# Altium PCB PCB1.PcbDoc
Units mm, origin at the board's own origin, x right, y up, seen from the top; angles counter-clockwise.
Board outline 42.11 x 50 mm, 2 copper layers (Top Layer, Bottom Layer); 15 components, 14 nets, 63 pads, 4 vias.
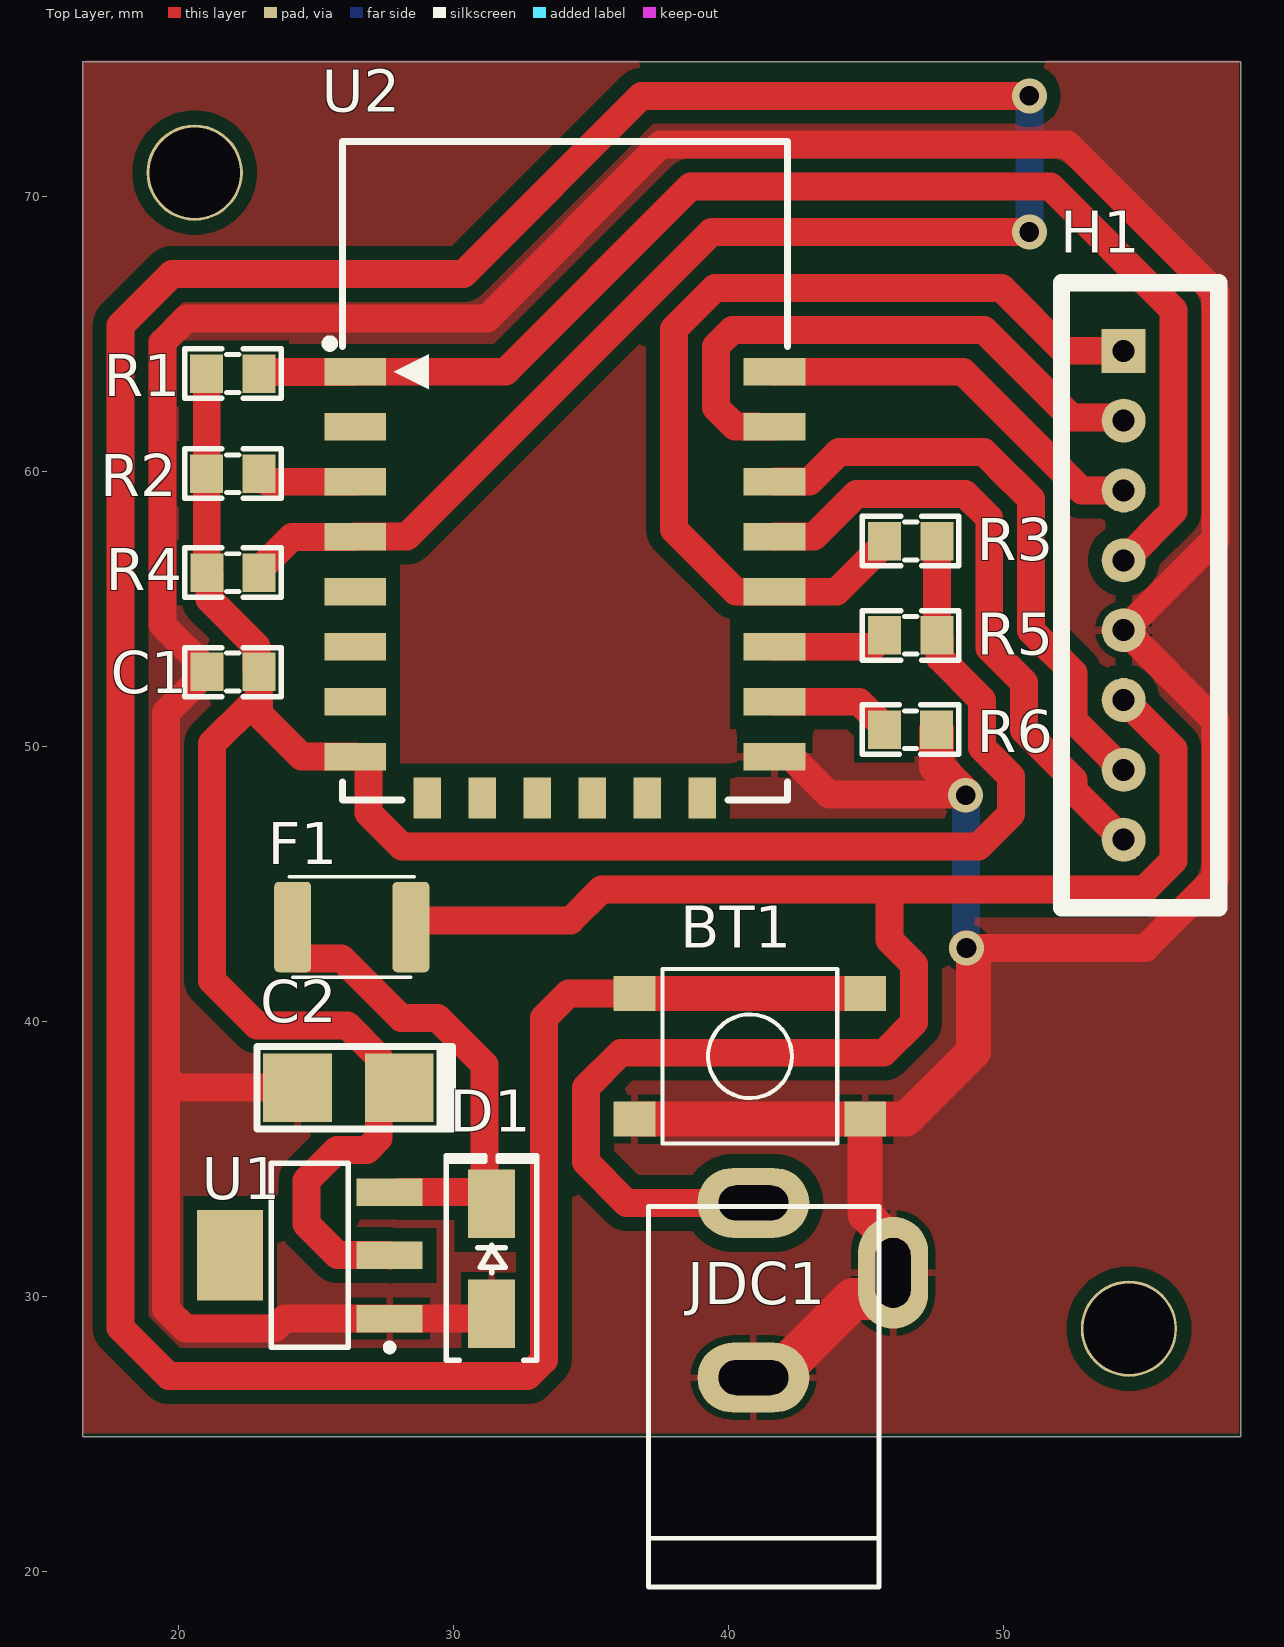
[diagram p0: Top Layer view]
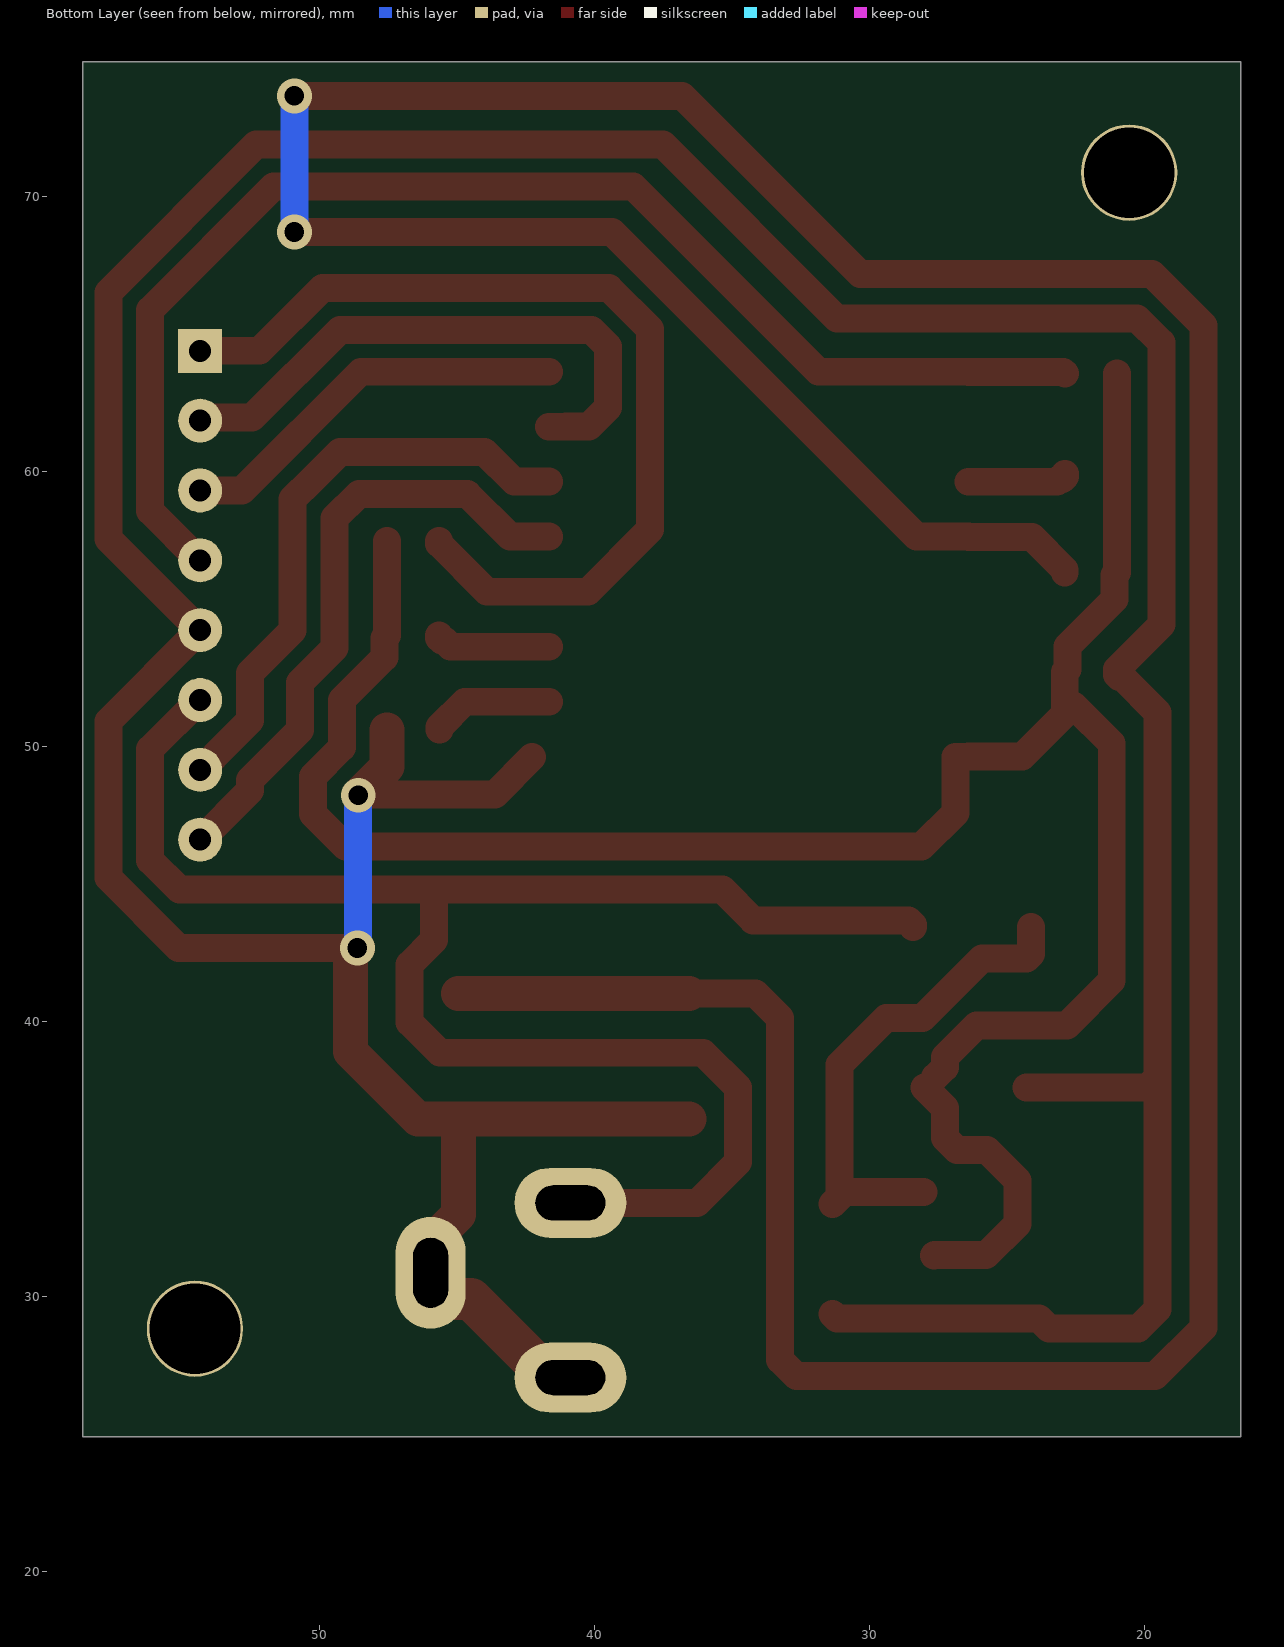
[diagram p1: Bottom Layer view, seen from below]
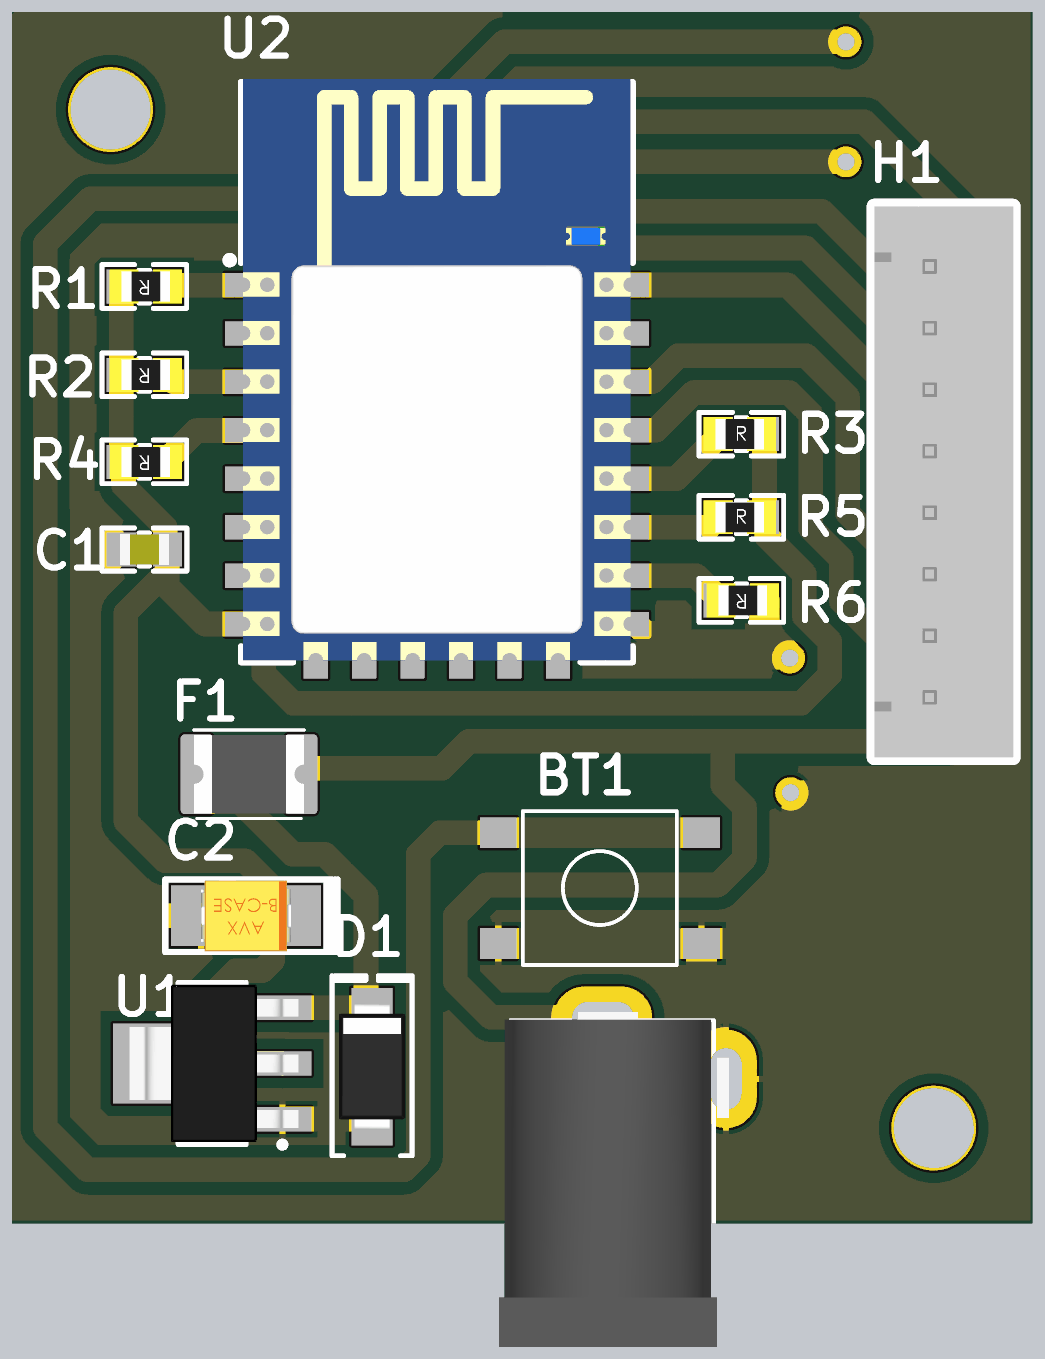
[diagram p2: 3D render of the assembled board from above, using the file's embedded part models]

## Layer stack, top to bottom
Top Solder: solder mask 0.0102, Solder Resist, Dk 3.5
Top Layer: signal copper 0.0356
Dielectric 1: dielectric 0.32, FR-4, Dk 4.8
Bottom Layer: signal copper 0.0356
Bottom Solder: solder mask 0.0102, Solder Resist, Dk 3.5

## Board outline
16.51,24.892 58.621,24.892 58.621,74.892 16.51,74.892 16.51,74.803

## Design rules (kind name [scope] priority, off if disabled: settings)
Clearance [All] p1: gap=0.508 ignorepadtopadclearanceinfootprint=FALSE
PolygonConnect [All] p1: connectstyle=Relief reliefconductorwidth=0.254 reliefentries=4 polygonreliefangle="90 Angle" airgapwidth=0.254
RoutingVias [All] p1: holewidth=0.711 width=1.27 viastyle="Through Hole" minholewidth=0.711 minwidth=1.27 maxholewidth=0.711 maxwidth=1.27
SolderMaskExpansion [All] p1: expansion=0.102 istentingtop=FALSE
Width [All] p1: maxlimit=1.524 minlimit=1.016 preferedwidth=1.27 minimp=50.000000 maximp=50.000000 favimp=50.000000
30 further rules are at their usual default settings.

## Components (designator, comment, footprint, x,y, rotation, side; value= is the part's Value field where it differs from the comment)
BT1 "Nut Nhan 4 Chan SMD 6x6" "Nut Nhan 4 Chan SMD 6x6" 40.767,38.735 r180 top
C1 "100nF" "tu 0805" 21.971,52.705 r180 top
C2 "100uF" "tu tantalum smd3528" 26.162,37.592 r180 top
D1 "SS34" "DIODE SMA" 31.369,31.369 r90 top
F1 "2.6A 6V" "Cau chi tu phuc hoi 2A 24V SMD1812" 26.289,43.434 r0 top
H1 "Header 8P 2.54 Duc Thang" XH2.54M-8 54.356,64.389 r270 top
JDC1 "Jac DC" DC0 43.434,30.226 r90 top
R1 "10k" "tro smd 0805" 21.968,63.5 r180 top
R2 "10k" "tro smd 0805" 21.968,59.855 r180 top
R3 "10k" "tro smd 0805" 46.609,57.531 r0 top
R4 "10k" "tro smd 0805" 21.971,56.261 r180 top
R5 "10k" "tro smd 0805" 46.609,54.102 r0 top
R6 "10k" "tro smd 0805" 46.609,50.546 r180 top
U1 "AMS1117-3.3V" SOT223 24.765,31.496 r90 top value="AMS1117-3.3V SOT223"
U2 "ESP8266 12" "ESP8266 12" 26.041,63.626 r0 top

## Footprints (in the part's own frame and the unit in brackets; to place one, negate y for a bottom-side part, rotate by r counter-clockwise, add the part's x,y. Pads: shape width x height; smd on the part's side, far side on the other; paste and mask are expansions set on the pad)
"Cau chi tu phuc hoi 2A 24V SMD1812" [mm]
  rrect25% 1.34x3.29 smd: 1(-2.15,0) 2(2.15,0)
  silkscreen extent -2.28,-1.83 2.28,1.83, body extent -2.27,-1.62 2.27,1.62, height 1.25
DC0 [mil] "Jac DC input"
  oval 100x160 hole 50 slot 100 at 90 deg: 1(125,100) 2(-125,100)
  oval 160x100 hole 50 slot 100 at 0 deg: 3(25,-100)
  silkscreen extent -425,-80 120,250, body extent -410,-105 134,269, height 434
"DIODE SMA" [mm] "SMA"
  rect 2.5x1.7 smd: 1(-2,0) 2(2,0)
  silkscreen extent -3.68,-1.65 3.75,1.65, body extent -2.6,-1.37 2.6,1.37, height 2.4
"ESP8266 12" [mm] "ESP-12 Wi-Fi Module by AI-Thinker"
  rect 2.25x1 smd: 1(0.375,0) 2(0.375,-2) 3(0.375,-4) 4(0.375,-6) 5(0.375,-8) 6(0.375,-10) 7(0.375,-12) 8(0.375,-14) 15(15.625,-14) 16(15.625,-12) 17(15.625,-10) 18(15.625,-8) 19(15.625,-6) 20(15.625,-4) 21(15.625,-2) 22(15.625,0)
  rect 1x1.5 smd: 9(3,-15.5) 10(5,-15.5) 11(7,-15.5) 12(9,-15.5) 13(11,-15.5) 14(13,-15.5)
  silkscreen extent -0.7,-15.57 16.08,8.37, body extent 0,-15.49 16,8.51, height 2.75
"Nut Nhan 4 Chan SMD 6x6" [mil] "SW SMD button 4pin, 250 x250 mil"
  rect 60x50 smd: 1(-165,90) 2(165,-90) 3(165,90) 4(-165,-90)
  silkscreen extent -125,-125 125,125, body extent -180,-125 180,125, height 130
SOT223 [mm]
  rect 1x2.4 smd: 1(-2.3,-2.9) 2(0,-2.9) 3(2.3,-2.9)
  rect 3.3x2.4 smd: 4(0,2.9)
  silkscreen extent -3.47,-3.03 3.35,1.4, body extent -3.25,-3.56 3.25,3.4, height 1.68
"tro smd 0805" [mm]
  rect 1.2x1.4 smd: 1(-0.946,-0.061) 2(0.954,-0.061)
  silkscreen extent -1.75,-0.97 1.75,0.84, body extent -1.56,-0.76 1.44,0.64, height 0.53
"tu 0805" [mm] "Compoment SMD 80x50mil"
  rect 1.2x1.4 smd: 1(-0.946,-0.003) 2(0.954,-0.003)
  silkscreen extent -1.75,-0.89 1.75,0.89, body extent -1.01,-0.64 1.01,0.63, height 0.61
"tu tantalum smd3528" [mm]
  rect 2.5x2.5 smd: 1(-1.85,0) 2(1.85,0)
  silkscreen extent -3.78,-1.5 3.33,1.5, body extent -1.85,-1.46 1.85,1.47, height 2.03
XH2.54M-8 [mm]
  rect 1.6x1.6 hole 0.8: 1(0,0)
  round 1.6 hole 0.8: 2(2.54,0) 3(5.08,0) 4(7.62,0) 5(10.16,0) 6(12.7,0) 7(15.24,0) 8(17.78,0)
  silkscreen extent -2.48,-2.26 20.26,3.46, body extent -2.48,-2.26 20.26,3.48, height 6.91

## Part data
BT1: "Nut Nhan 4 Chan 6.2x6.2x3.5", Ma_Hang=MH002424, Ten="Nút Nhấn 4 Chân 6.2x6.2x3.1MM SMD"
C1: library part "Tu 0805 221 50V", "Dán", Chung_Loai=Dán, Don_Vi=Con, Ma_Hang=MH007365, So_Chan=2, Ten_Linh_Kien="Tụ 0805 221-220P 50V"
C2: library part "Tu tantalum 100uF 6.3V SMD3528", "Tu Tantalum SMD3528", Chung_Loai=Dán, Don_Vi=Con, Ma_Hang=MH007595, So_Chan=2, Ten_Linh_Kien="Tụ tantalum 107J-100uF 6.3V SMD3528"
D1: library part "Diode SS34 ( 1N5822 )", "Dán", Chung_Loai=Dán, Don_Vi=Con, Ma_Hang=MH002104, Ten_Linh_Kien="Diode SS34 3A 40V SMA ( 1N5822 SS34A)"
F1: library part "Cau chi tu phuc hoi 2A 24V SMD1812", "https://linhkienchatluong.vn/cau-chi-tu-phuc-hoi-ptc/cau-chi-tu-phuc-hoi-1812-26a-6v-smd-2xx260f_sp845_ct1259.aspx", Ma_Hang=MH010033, Ten="Cầu Chì Tự Phục Hồi 2A 24V SMD1812"
H1: "Cắm", Chung_Loai=Cắm, Don_Vi=Con, Ma_Hang=MH003366, Ten_Linh_Kien="Header 8P XH2.54-8P Đực Thẳng"
JDC1: library part DCIN, "Jac DC input"
R1 R2 R3 R4 R5 R6: library part "Tro 0805 5% 12k", "Dán", Chung_Loai=Dán, Don_Vi=Con, Ma_Hang=MH005241, So_Chan=2, Ten_Linh_Kien="Trở 0805 5% 12k"
U1: library part "AMS1117 SMD", "Dán", Chung_Loai=Dán, Don_Vi=Con, Ma_Hang=MH000596
U2: "ESP8266 12 22 Pin", IC=ESP8266-EX, Vendor=Ai-thinker

## Free pads (board coordinates)
  round 3.5 hole 3.3: ""(20.574,70.866) ""(54.547,28.829)

## Via types
v1: diameter 1.27, hole 0.711, Top Layer to Bottom Layer, 4 vias

## Nets (pads, with @x,y where several pads share a name; then routed paths per layer and width w, separated by ;. In a path a pad name is that pad's centre, name@x,y a point inside that pad or via, vN(x,y) a via of type N, cw(c..) or ccw(c..) an arc to the next point about the centre after c; other vN are vias at no path point)
+3.3: C1.1 C2.1 R1.2 R2.2 R3.2 R4.2 R5.2 U1.2 U2.8 | length 84.4
  Top Layer w1.016: R1.2 R2.2 21.015,59.915 R4.2 R4.2 21.109,56.23 21.109,55.353 22.825,53.637 22.825,52.8 C1.1 22.917,51.181 24.464,49.634 26.408,49.634 U2.8 26.886,49.626 26.894,49.618 26.894,47.586 28.12,46.36 49.076,46.36 50.257,47.541 50.257,48.909 49.206,49.961 49.206,51.693 47.655,53.243 47.655,53.949 R5.2 R3.2 ; 22.601,51.497 21.209,50.105 21.209,41.489 22.84,39.858 26.127,39.858 27.27,38.715 27.27,38.334 C2.1@27.631,37.973 ; U1.2 27.657,31.504 25.773,31.504 24.638,32.639 24.638,34.218 25.746,35.326 26.837,35.326 27.27,35.759 27.27,36.85 C2.1
+5: F1.2 H1.6 JDC1.1 | length 62.9
  Top Layer w1.016: F1.2 28.439,43.517 28.601,43.679 34.249,43.679 35.363,44.793 45.847,44.793 ; JDC1.1 36.282,33.401 34.798,34.885 34.798,37.592 36.068,38.862 45.633,38.862 46.736,39.965 46.736,42.077 45.847,42.966 45.847,44.793 ; H1.6 54.384,51.689 56.172,49.901 56.172,45.857 55.108,44.793 45.847,44.793
GND: BT1.1 BT1.3 C1.2 C2.2 D1.1 H1.5 JDC1.2 JDC1.3 R6.1 U1.1 U2.15 | length 176.8
  Top Layer w1.016: C2.2 19.919,37.592 19.538,37.973 ; D1.1 31.204,29.204 27.673,29.204 U1.1 23.852,29.196 23.486,28.83 20.244,28.83 19.538,29.536 19.538,37.973 ; U2.15@42.283,49.618 43.641,48.26 v1@48.571,48.26 ; v1(48.641,42.672) 55.142,42.672 57.696,45.226 57.696,50.917 H1.5@54.384,54.229 ; H1.5 H1.5@54.384,54.229 ; 19.538,37.973 19.538,51.23 20.825,52.516 20.925,52.516 21.017,52.608 21.017,52.808 19.398,54.427 19.398,64.682 20.284,65.568 31.206,65.568 37.52,71.882 52.32,71.882 57.696,66.506 57.696,57.541 H1.5@54.384,54.229
  Top Layer w1.27: BT1.3 BT1.1 ; JDC1.3 45.974,31.967 44.958,32.983 BT1.1 ; R6.1 47.555,49.277 v1@48.571,48.26 ; v1(48.641,42.672) 48.895,42.418 48.895,38.9 46.444,36.449 BT1.1
  Top Layer w1.524: JDC1.2 41.656,27.051 44.51,29.905 45.505,29.905 45.974,30.374 JDC1.3
  Bottom Layer w1.016: v1(48.606,48.225) 48.624,48.208 48.624,42.689 v1(48.641,42.672)
GPIO0: H1.1 R3.1 U2.18 | length 34.6
  Top Layer w1.016: R3.1 45.663,57.37 43.919,55.626 U2.18 40.259,55.626 38.001,57.884 38.001,65.178 39.497,66.674 49.907,66.674 52.192,64.389 H1.1
NetBT1_2: BT1.2 BT1.4 R4.1 U2.4 | length 152
  Top Layer w1.016: R4.1 22.917,56.422 24.113,57.618 26.408,57.618 U2.4 26.424,57.634 28.302,57.634 39.375,68.707 v1(50.927,68.707) ; BT1.2 34.163,41.021 33.274,40.132 33.274,27.698 32.679,27.103 19.633,27.103 17.874,28.862 17.874,65.313 19.744,67.183 30.353,67.183 36.83,73.66 v1(50.927,73.66)
  Top Layer w1.27: BT1.2 BT1.4
  Bottom Layer w1.016: v1(50.927,68.707) v1(50.927,73.66)
NetD1_2: D1.2 F1.1 U1.3 | length 17.7
  Top Layer w1.016: F1.1 24.139,42.459 24.301,42.297 25.922,42.297 28.087,40.132 29.409,40.132 31.115,38.426 31.115,33.623 D1.2 ; U1.3@28.046,33.796 D1.2@30.988,33.796
NetR2_1: R2.1 U2.3 | length 3.7
  Top Layer w1.016: R2.1 22.914,59.816 23.006,59.724 23.106,59.724 23.204,59.626 U2.3
NetR5_1: R5.1 U2.17 | length 4.2
  Top Layer w1.016: U2.17 45.248,53.626 45.471,53.849 45.571,53.849 45.663,53.941 R5.1
NetR6_2: R6.2 U2.16 | length 4.5
  Top Layer w1.016: U2.16 44.735,51.626 45.655,50.707 R6.2
RST: H1.4 R1.1 U2.1 | length 47.8
  Top Layer w1.016: R1.1 22.971,63.618 26.408,63.618 U2.1 31.876,63.626 38.608,70.358 51.689,70.358 56.172,65.875 56.172,58.557 54.384,56.769 H1.4
RX: H1.2 U2.21 | length 21.1
  Top Layer w1.016: U2.21 41.057,61.626 41.049,61.634 40.22,61.634 39.525,62.329 39.525,64.547 40.128,65.15 49.276,65.15 52.465,61.961 54.244,61.961 H1.2
SENSOR: H1.8 U2.19 | length 22.5
  Top Layer w1.016: U2.19 41.674,57.634 43.09,57.634 44.643,59.186 48.584,59.186 49.468,58.302 49.468,53.585 50.73,52.324 50.73,50.592 52.54,48.782 52.54,48.397 54.328,46.609 H1.8
SERVO: H1.7 U2.20 | length 21.7
  Top Layer w1.016: U2.20 41.674,59.634 42.935,59.634 44.011,60.71 49.268,60.71 50.284,59.694 50.292,59.694 50.992,58.993 50.992,54.216 52.54,52.669 52.54,50.937 53.34,50.137 54.328,49.149 H1.7
TX: H1.3 U2.22 | length 14.5
  Top Layer w1.016: U2.22 48.515,63.626 52.832,59.309 H1.3
pads on no net: U1.4 U2.2 U2.5 U2.6 U2.7 U2.9 U2.10 U2.11 U2.12 U2.13 U2.14

## Polygon pours and split planes (outlines as drawn)
GND on Top Layer "GND_L01_P000" (solid, remove dead copper, pour order 0): 16.51,74.803 16.637,74.93 58.547,74.93 58.547,25.019 16.51,25.019 16.51,74.93

## Silkscreen, mask and mechanical layers (free items; w line width, h text height)
Bottom Solder:
  lines w0.254: 16.51,74.803 16.51,24.892 58.621,24.892 58.621,74.892 16.51,74.892

## Text inside footprints (layer, text, board x,y; h text height)
U2: Mechanical 13 "CUTOUT POLYGON" at 26.168,70.992 h0.25; Mechanical 13 "ANTENNA AREA" at 26.168,71.5 h0.25